# EAGLE board Power Supply (EAGLE 5.11)
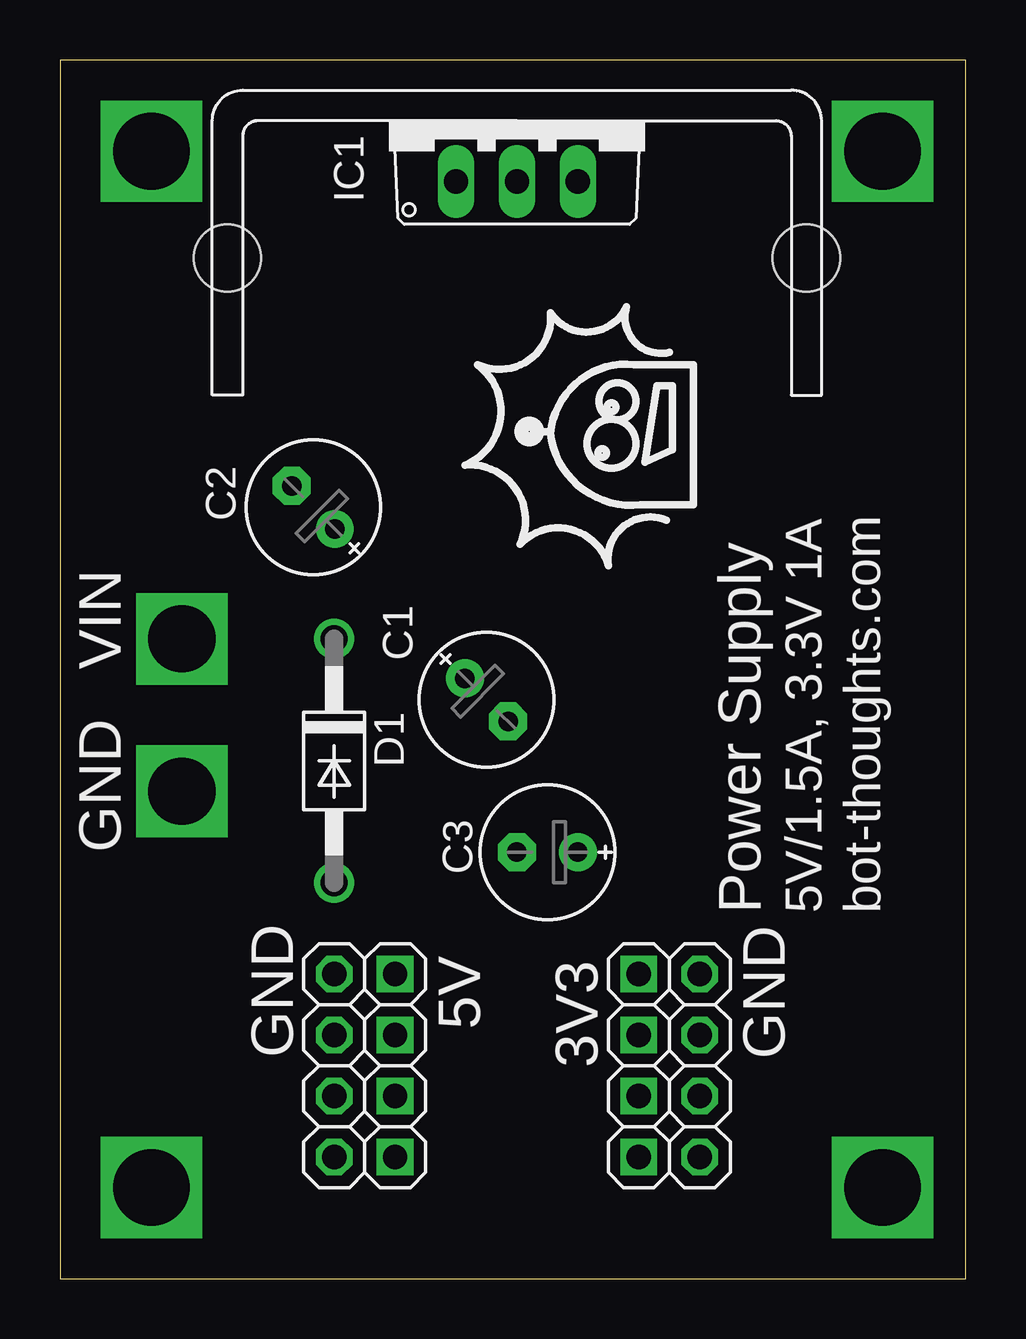
[diagram p0: board, top side]
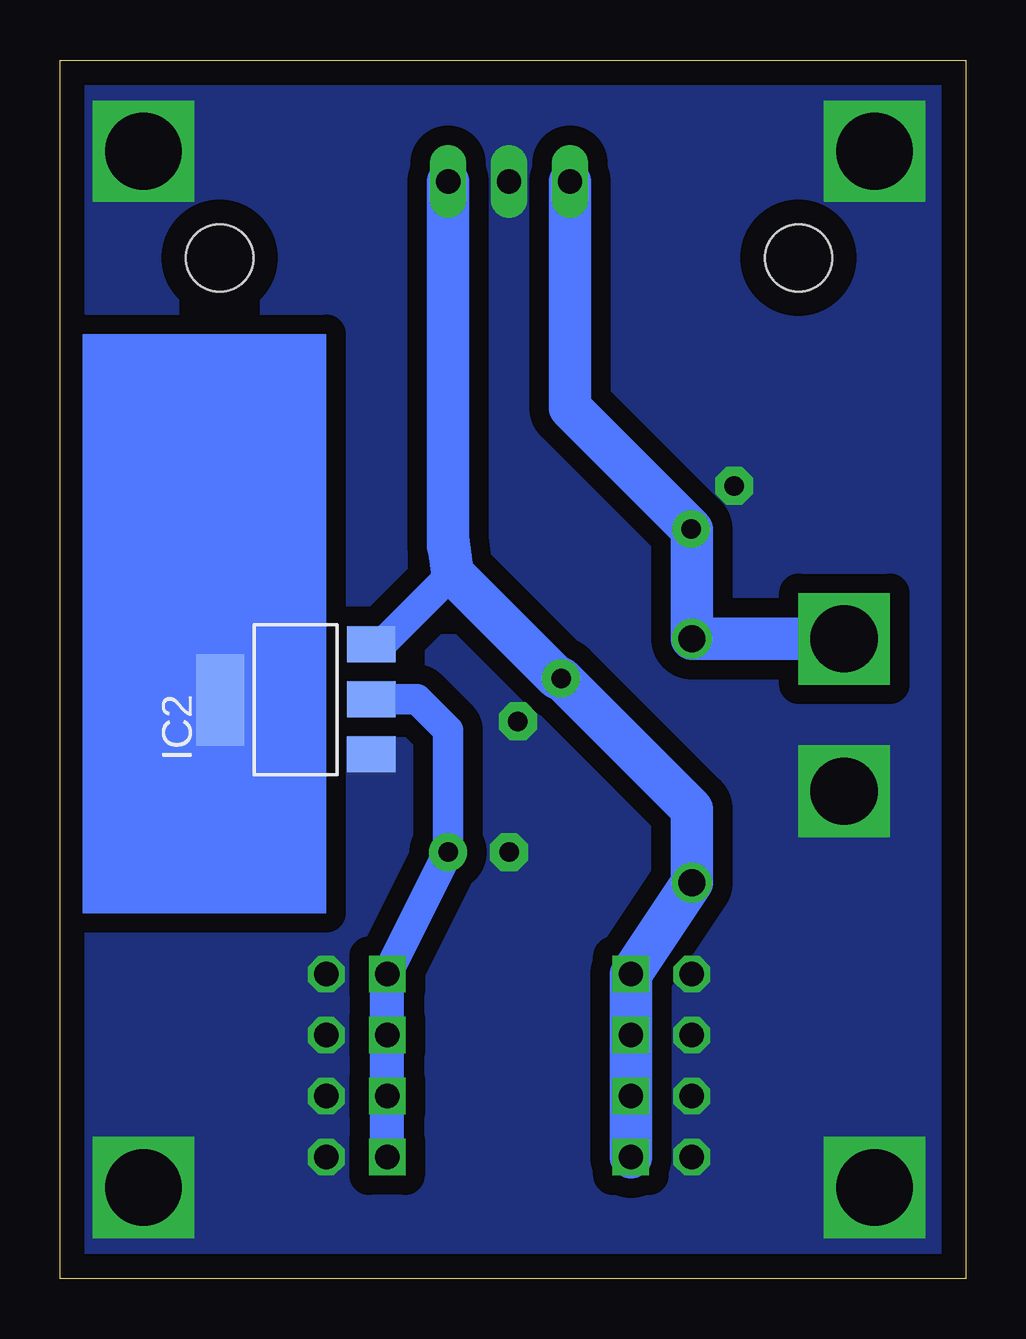
[diagram p1: board, bottom side, seen from below]

Size 37.77 x 50.79 mm. Coordinates in mm from the lower left corner, seen from the top.
Outline: 0,0 37.77,0 37.77,50.79 0,50.79 0,0
Copper layers (1*16): Top 0.035mm / dielectric 1.5mm / Bottom 0.035mm
Design rules "default": minimum track width 10mil, minimum drill 24mil, track to track 8mil, track to pad 8mil, pad to pad 8mil, via to via 8mil, smd to smd 8mil, copper to edge 40mil, drill to drill 8mil, minimum pad ring 10mil, minimum via ring 8mil, stop-mask expansion 4mil, vias tented up to drill 0mil, thermal gap 10mil

## Footprints (pad centres in the part's own frame; a part is rotated, then mirrored left to right if it is on the bottom)
E2,5-6E = drill 0.813 pad 1.575 round: + -1.27,0 | drill 0.813 pad 1.575 octagon: - 1.27,0
DO41-10 = drill 1.118 round: A 5.08,0; C -5.08,0
TO220V = drill 1.016 long: 1 -2.54,-2.54; 2 0,-2.54; 3 2.54,-2.54
SOT223 = smd 1.499 x 2.007: 1 -2.261,-3.15; 2 0.025,-3.15; 3 2.311,-3.15 | smd 3.81 x 2.007: 4 0,3.15
1X02-S = drill 1.016 square: 1 -1.27,0 | drill 1.016 octagon: 2 1.27,0
AAVID.523002B00000G = hole 2.8: -12.065,5.715; 12.065,5.715

## Placement (x,y rotation side)
C1  0.1uF  [E2,5-6E]  17.78,24.13 315 top
C2  0.33uF  [E2,5-6E]  10.56,32.15 135 top
C3  0.1uF  [E2,5-6E]  20.32,17.78 180 top
D1  1N4004  [DO41-10]  11.43,21.59 270 top
IC1  7805TV  [TO220V]  19.05,48.26 0 top
IC2  REG1117  [SOT223]  27.94,24.13 90 bottom
JP1  [1X02-S]  12.7,12.7 180 top
JP2  [1X02-S]  12.7,10.16 180 top
JP3  [1X02-S]  12.7,7.62 180 top
JP4  [1X02-S]  12.7,5.08 180 top
JP5  [1X02-S]  25.4,12.7 0 top
JP6  [1X02-S]  25.4,10.16 0 top
JP7  [1X02-S]  25.4,7.62 0 top
JP8  [1X02-S]  25.4,5.08 0 top
M1  [AAVID.523002B00000G]  19.05,48.26 180 top
U$1  [BOT-THOUGHTS]  24.13,35.56 90 top

## Library data of the parts
C1-C3 = rcl
D1 = diode
IC1 = linear
IC2 = burr-brown; MPN: REG1117; OC_FARNELL: 1097566; OC_NEWARK: 14P6981
JP1-JP8 = pinhead-2
M1 U$1 = mes

## Nets
+3.3V: C3.+ IC2.2 JP5.1 JP6.1 JP7.1 JP8.1
+5V: C1.+ D1.A IC1.3 IC2.3 JP1.1 JP2.1 JP3.1 JP4.1
GND: C1.- C2.- C3.- IC1.2 IC2.1 JP1.2 JP2.2 JP3.2 JP4.2 JP5.2 JP6.2 JP7.2 JP8.2
VIN: C2.+ D1.C IC1.1

## Tracks (layer width: path | path; a pad name or v marks a point on that pad's centre or on a via)
+3.3V
  Bottom 1.27: IC2.2 22.89,24.16 21.59,22.86 C3.+ JP5.1
  Bottom 1.422: JP5.1 JP6.1 JP7.1 JP8.1
+5V
  Bottom 0.813: 24.36,26.44 IC2.3
  Bottom 1.27: 24.36,26.44 21.59,29.21 21.59,29.58 21.41,29.39
  Bottom 1.778: 21.54,30.49 21.41,29.39 17.04,25.03 C1.+ 11.43,19.58 D1.A JP1.1 JP2.1 JP3.1 JP4.1 | 21.54,30.49 21.59,30.85 | IC1.3 21.59,30.53 21.54,30.49
GND  (via drill 2.8, 3.2)
  other vias: 5.08,20.32 3.81,3.81 34.29,3.81 3.81,46.99 34.29,46.99
  pour Bottom (isolate 0.813, no thermals): 0,50.8 38.1,50.8 38.1,0 0,0
VIN  (via drill 2.8)
  Bottom 1.778: v5.08,26.67 D1.C 11.43,31.22 C2.+ 16.51,36.3 IC1.1
(copper drawn outside any net)
  shapes: Bottom area x1

## Text on the board
tNames: VIN | GND | Power Supply | 5V/1.5A, 3.3V 1A | bot-thoughts.com | 5V | GND | 3V3 | GND